# Altium PCB NODEMCU——ESP8266_2024-03-10.pcbdoc
Units mil, origin at the board's own origin, x right, y up, seen from the top; angles counter-clockwise.
Board outline 2090 x 2967.63 mil, 2 copper layers (Top Layer, Bottom Layer); 1 components, 0 nets, 30 pads, 0 vias.
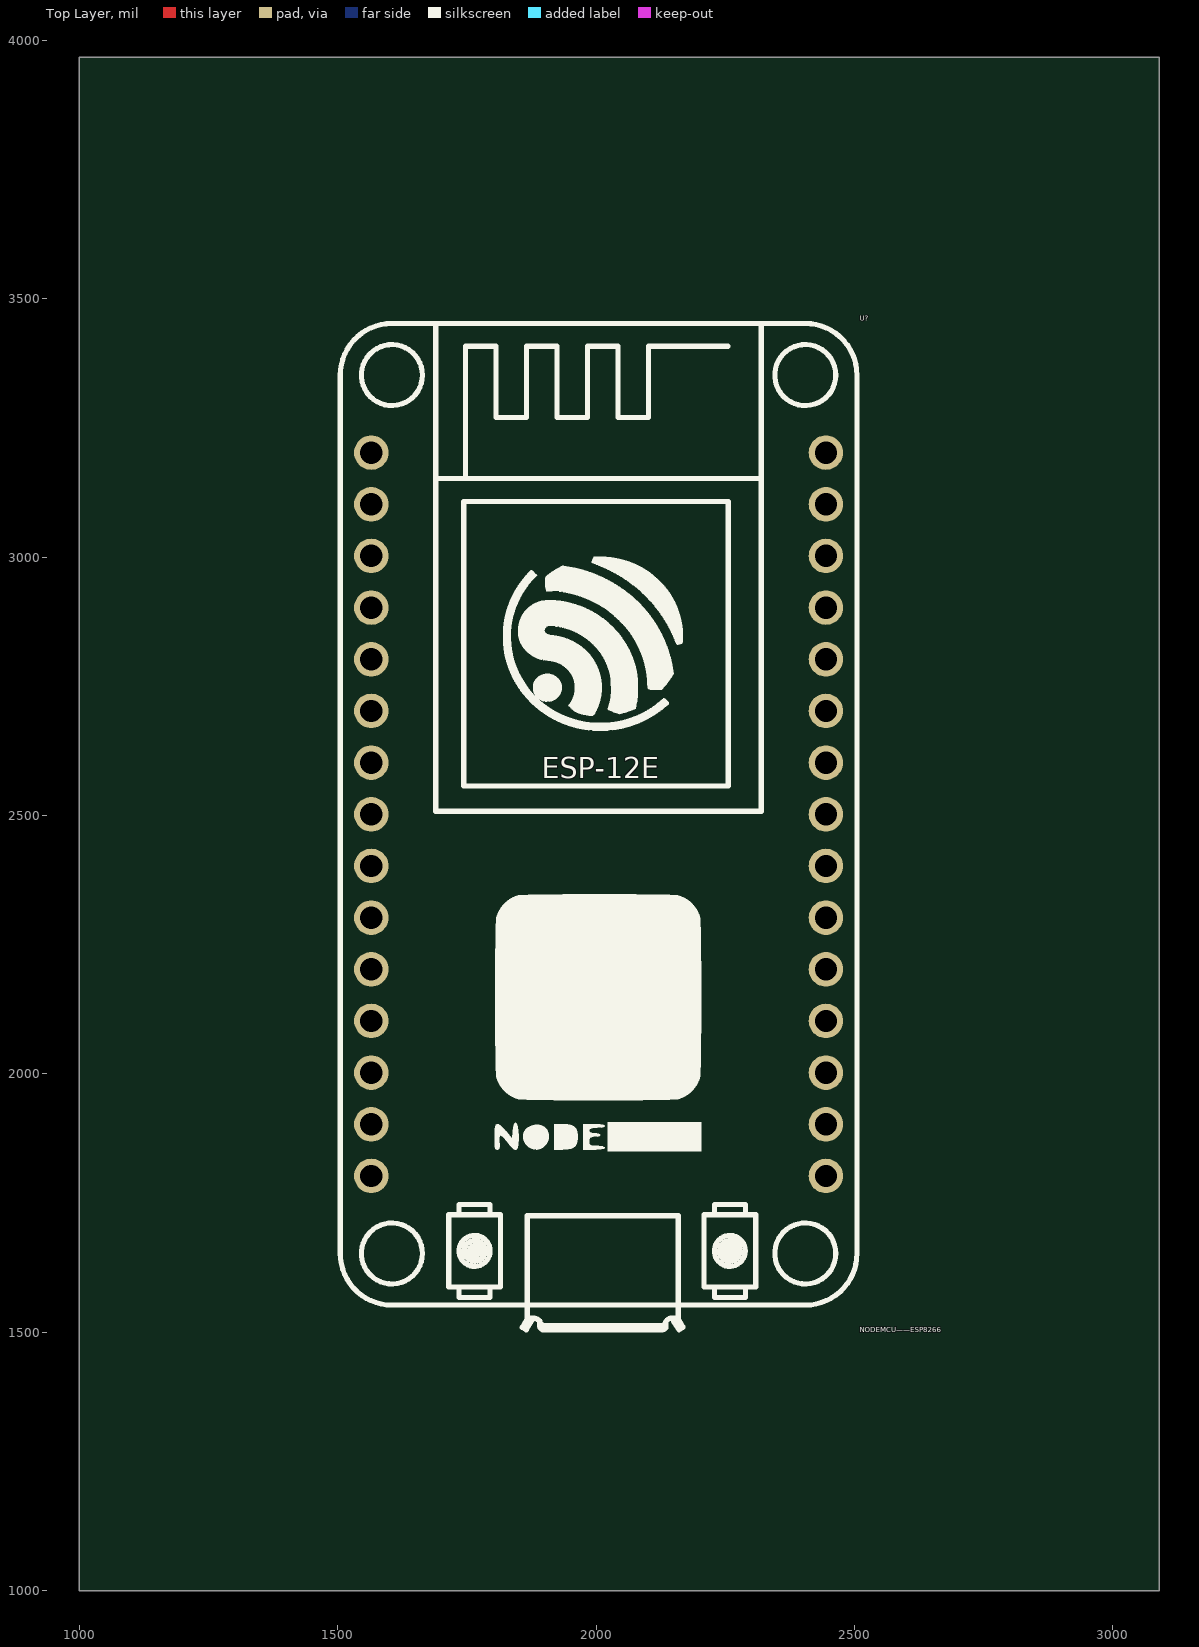
[diagram p0: Top Layer view]
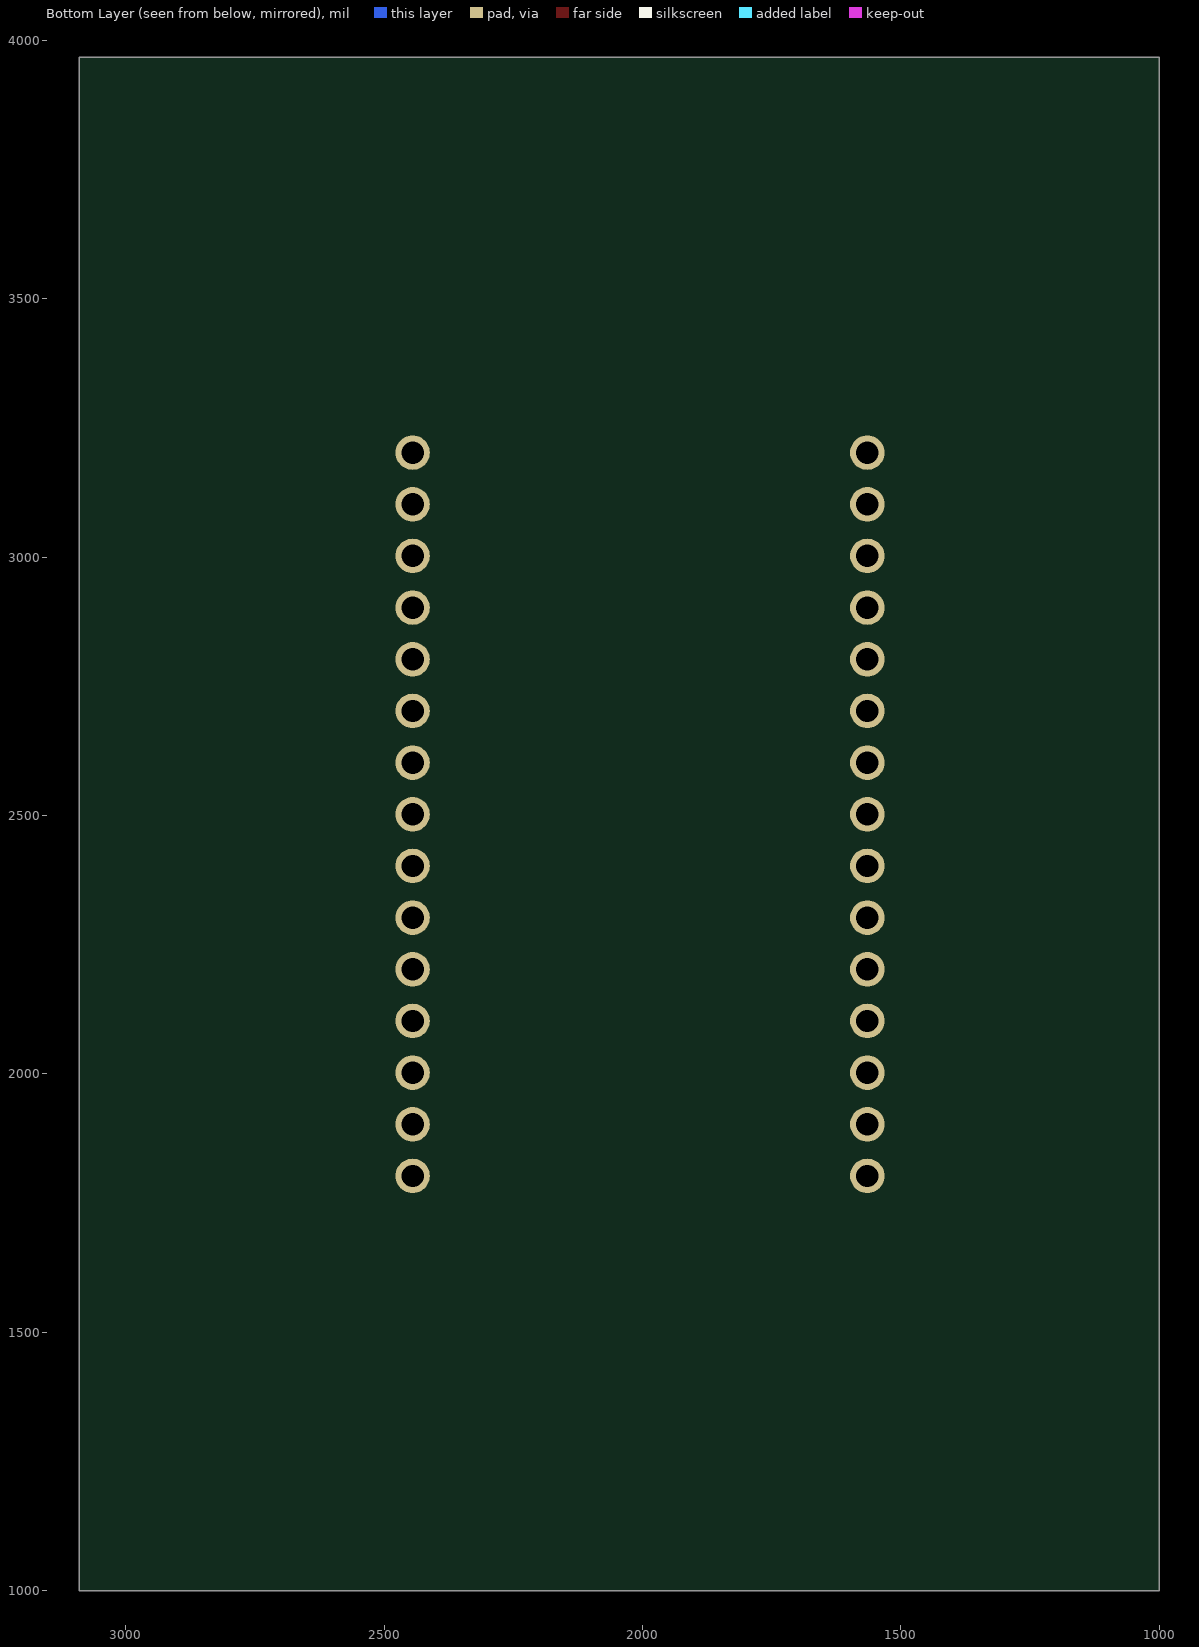
[diagram p1: Bottom Layer view, seen from below]

## Layer stack, top to bottom
Top Layer: signal copper (thickness not stored)
Dielectric: dielectric 12.6, FR-4, Dk 4.8
Bottom Layer: signal copper (thickness not stored)

## Board outline
3090,1000 1000,1000 1000,3967.63 3090,3967.63

## Components (designator, comment, footprint, x,y, rotation, side; value= is the part's Value field where it differs from the comment)
U? "NODEMCU——ESP8266" NODEMCU——ESP8266 2005,2478.81 r0 top

## Footprints (in the part's own frame and the unit in brackets; to place one, negate y for a bottom-side part, rotate by r counter-clockwise, add the part's x,y. Pads: shape width x height; smd on the part's side, far side on the other; paste and mask are expansions set on the pad)
NODEMCU——ESP8266 [mm]
  round 1.7 hole 1.1 paste+0 mask+0.102: 1(-11.176,-17.175) 2(-11.176,-14.635) 3(-11.176,-12.095) 4(-11.176,-9.555) 5(-11.176,-7.015) 6(-11.176,-4.475) 7(-11.176,-1.935) 8(-11.176,0.605) 9(-11.176,3.145) 10(-11.176,5.685) 11(-11.176,8.225) 12(-11.176,10.765) 13(-11.176,13.305) 14(-11.176,15.845) 15(-11.176,18.385) 16(11.176,-17.175) 17(11.176,-14.635) 18(11.176,-12.095) 19(11.176,-9.555) 20(11.176,-7.015) 21(11.176,-4.475) 22(11.176,-1.935) 23(11.176,0.605) 24(11.176,3.145) 25(11.176,5.685) 26(11.176,8.225) 27(11.176,10.765) 28(11.176,13.305) 29(11.176,15.845) 30(11.176,18.385)
  silkscreen extent -12.7,-24.73 12.7,24.73

## Nets (pads, with @x,y where several pads share a name; then routed paths per layer and width w, separated by ;. In a path a pad name is that pad's centre, name@x,y a point inside that pad or via, vN(x,y) a via of type N, cw(c..) or ccw(c..) an arc to the next point about the centre after c; other vN are vias at no path point)
pads on no net: U?.1 U?.2 U?.3 U?.4 U?.5 U?.6 U?.7 U?.8 U?.9 U?.10 U?.11 U?.12 U?.13 U?.14 U?.15 U?.16 U?.17 U?.18 U?.19 U?.20 U?.21 U?.22 U?.23 U?.24 U?.25 U?.26 U?.27 U?.28 U?.29 U?.30

## Silkscreen, mask and mechanical layers (free items; w line width, h text height)
Document:
  lines w0.1: 2044.99,2483.8 2045.01,2483.82

## Text inside footprints (layer, text, board x,y; h text height)
U?: Top Overlay "ESP-12E" at 1895,2572.63 h40